# EAGLE board openSX70-FTDI-232RL-Basic-5V_V3 (EAGLE 9.0.0)
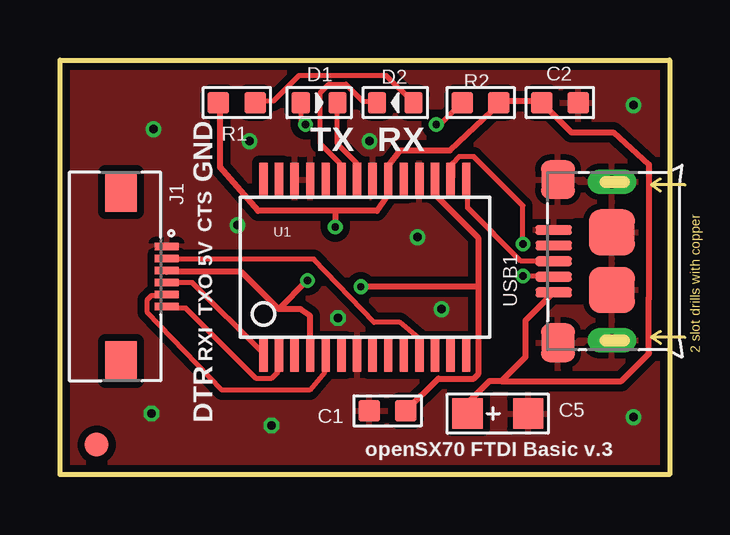
[diagram p0: board, top side]
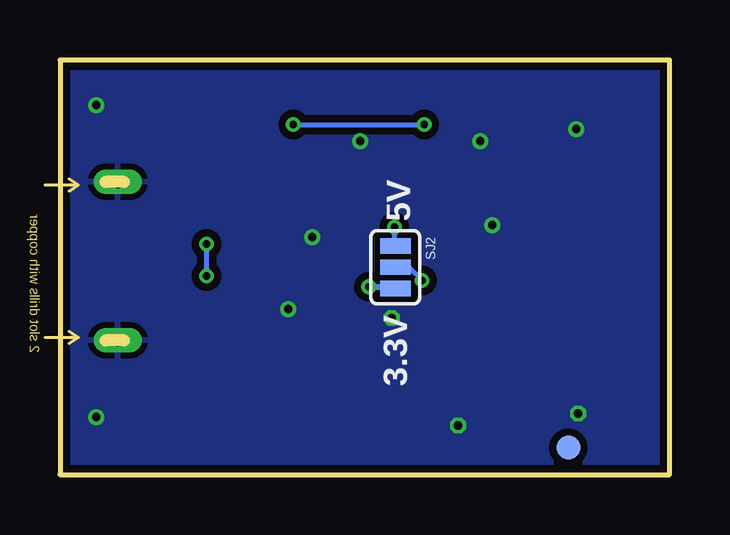
[diagram p1: board, bottom side, seen from below]

Size 25.4 x 17.27 mm. Coordinates in mm from the lower left corner, seen from the top.
Outline: 0,17.27 25.4,17.27 25.4,0 0,0 0,17.27
Copper layers (1*16): Top 0.035mm / dielectric 1.5mm / Bottom 0.035mm
Design rules "SeeedStudio_2layer_DRU_no_angle_20140221": minimum track width 6mil, minimum drill 12mil, track to track 6mil, track to pad 6mil, pad to pad 6mil, via to via 6mil, smd to smd 0mil, copper to edge 10mil, drill to drill 10mil, minimum pad ring 10mil, minimum via ring 6mil, stop-mask expansion 2mil, vias tented up to drill 100mil, thermal gap 10mil
Net classes: 0 default: width 0.203 mm; 1 power: width 0.254 mm

## Footprints (pad centres in the part's own frame; a part is rotated, then mirrored left to right if it is on the bottom)
C0603 = smd 0.889 x 0.889: 1 0,0.762; 2 0,-0.762
AVX-A = smd 1.27 x 1.27: + -1.27,0; - 1.27,0
LED-0603 = smd 0.762 x 0.889: + -0.762,0; - 0.762,0
687106183722 = smd 0.3 x 1: 1 -1.25,1.9; 2 -0.75,1.9; 3 -0.25,1.9; 4 0.25,1.9; 5 0.75,1.9; 6 1.25,1.9 | smd 1.65 x 1.3: Z1 -3.525,0; Z2 3.525,0
FIDUCIAL-1X2 = smd 1 x 1: 1 0,0
R0603 = smd 0.889 x 0.889: 1 0,0.762; 2 0,-0.762
SJ_3 = smd 0.635 x 1.27: 1 -0.889,0; 2 0,0; 3 0.889,0
SSOP28DB = smd 0.348 x 1.397: 1 -4.225,-3.656; 2 -3.575,-3.656; 3 -2.925,-3.656; 4 -2.275,-3.656; 5 -1.625,-3.656; 6 -0.975,-3.656; 7 -0.325,-3.656; 8 0.325,-3.656; 9 0.975,-3.656; 10 1.625,-3.656; 11 2.275,-3.656; 12 2.925,-3.656; 13 3.575,-3.656; 14 4.225,-3.656; 15 4.225,3.656; 16 3.575,3.656; 17 2.925,3.656; 18 2.275,3.656; 19 1.625,3.656; 20 0.975,3.656; 21 0.325,3.656; 22 -0.325,3.656; 23 -0.975,3.656; 24 -1.625,3.656; 25 -2.275,3.656; 26 -2.925,3.656; 27 -3.575,3.656; 28 -4.225,3.656
MICRO-USB5+6P-SMD-0.65-B = smd 0.4 x 1.5: 1 -1.3,-0.25; 2 -0.65,-0.25; 3 0,-0.25; 4 0.65,-0.25; 5 1.3,-0.25 | smd 1.6 x 1.4: S1 -3.4,-0.427; S6 3.4,-0.427 | drill 0.508 pad 1.016 long: S2 -3.3,-2.675; S5 3.3,-2.675 | smd 1.9 x 1.9: S3 -1.2,-2.675; S4 1.2,-2.675

## Placement (x,y rotation side)
C1  100nf  [C0603]  13.65,2.65 270 top
C2  100nf  [C0603]  20.83,15.49 90 top
C5  10uf  [AVX-A]  18.24,2.54 0 top
D1  GREEN-0603  [LED-0603]  10.79,15.49 0 top
D2  YELLOW-0603  [LED-0603]  13.97,15.49 180 top
FRAME1  FRAME-LETTER  [CREATIVE_COMMONS]  -0.69,-1.27 0 top
J1  687106183722  [687106183722]  2.54,8.26 270 top
JP3  FIDUCIAL1X2  [FIDUCIAL-1X2]  1.52,1.24 0 top
JP5  FIDUCIAL1X2  [FIDUCIAL-1X2]  4.22,1.12 0 bottom
R1  1K  [R0603]  7.37,15.49 270 top
R2  1K  [R0603]  17.53,15.49 90 top
SJ2  [SJ_3]  11.43,8.64 270 bottom
U1  FT232RLSSOP  [SSOP28DB]  12.7,8.64 0 top
USB1  10118193-0001LF  [MICRO-USB5+6P-SMD-0.65-B]  20.32,8.89 90 top

## Library data of the parts
C1 C2 = openSX70_PATHFINDER_V5.5-SEEED_20180522; MPN: CC0603KRX7R9BB104
C5 = Seeed-Capacitor-2016; MPN: TAJA106K016RNJ
D1 = Seeed-LED; MPN: 19-217-G7C-AN1P2-3T
D2 = Seeed-LED-2016; MPN: 19-217-Y5C-AM1N1VY-3T
FRAME1 = SparkFun-Aesthetics
J1 = openSX70_PATHFINDER_V5.5-SEEED_20180522; AVAILABILITY: Good; DESCRIPTION: CONN FFC BTM 6POS 0.5MM SMD R/A; MF: Wurth Electronics; MP: 687106183722; PACKAGE: None; PRICE: 1.21 USD
JP3 JP5 SJ2 U1 = SparkFun
R1 R2 = openSX70_PATHFINDER_V5.5-SEEED_20180522; MPN: RC0603FR-071KL
USB1 = Seeed-Connector -2016; MPN: 10118193-0001LF

## Nets
3.3V [power]: C1.1 SJ2.3 U1.17
5V: C2.1 C5.+ R1.2 R2.2 SJ2.1 U1.20 USB1.1
CTS: J1.2 U1.11
DTR: J1.6 U1.2
GND [power]: C1.2 C2.2 C5.- J1.1 U1.7 U1.18 U1.21 U1.25 U1.26 USB1.5 USB1.S1 USB1.S2 USB1.S3 USB1.S4 USB1.S5 USB1.S6
N$1: D2.+ R1.1
N$2: D1.+ R2.1
N$3: U1.16 USB1.2
POWER: J1.3 SJ2.2 U1.4
RXI: J1.5 U1.5
RXLED: D1.- U1.22
TXLED: D2.- U1.23
TXO: J1.4 U1.1
USB_D+: U1.15 USB1.3

## Tracks (layer width: path | path; a pad name or v marks a point on that pad's centre or on a via)
3.3V  (via drill 0.3)
  Top 0.254: 17.42,7.82 17.42,9.87 15.65,11.65 15.65,12.27 U1.17 | 17.42,7.82 17.42,4.18 17.25,4 15.76,4 C1.1 | 17.42,7.82 v12.54,7.82
  Bottom 0.254: v12.54,7.82 11.47,7.82 SJ2.3
5V  (via drill 0.3)
  Top 0.203: 20.54,7.56 USB1.1 20.62,7.56 21.07,7.56 | 18.31,15.56 R2.2 18.23,15.47 18.35,15.47 | 20,15.56 C2.1 | 13.6,11.56 13.6,12.27 U1.20 13.69,12.36 13.69,12.89 | 6.67,15.47 R1.2
  Top 0.254: 20,15.56 18.31,15.56 | 6.67,15.47 6.67,12.8 8.26,10.99 11.47,10.99 | 11.47,10.99 13.21,10.99 13.6,11.56 | 11.47,10.99 v11.47,10.31 | 18.35,15.47 16.26,13.51 14.18,13.51 13.69,12.89 | 24.54,7.39 24.54,12.91 23.05,14.26 21.3,14.26 C2.1 | 24.54,7.39 24.54,7.31 | USB1.1 19.39,6.41 19.39,4.89 18.39,3.89 | 18.39,3.89 17.89,3.89 16.97,2.97 C5.+ | 18.39,3.89 23.39,3.89 24.52,5.02 arc45 24.54,5.08 24.54,7.38 arc45 24.54,7.39
  Bottom 0.203: v11.47,10.31 11.47,9.6 SJ2.1
CTS
  Top 0.203: J1.2 4.45,8.98 10.58,8.98 13.09,6.34 14.16,6.34 14.94,5.69 14.94,5.07 U1.11
DTR
  Top 0.203: J1.6 4.45,6.93 5.25,6.93 8.18,4 8.8,4 9.07,4.27 9.07,4.98 U1.2
GND  (via drill 0.35)
  other vias: 3.81,2.54 11.58,6.53 14.89,9.89 3.89,14.39 15.89,6.89 23.89,15.39 23.89,2.39 8.81,2.04 7.39,10.39 7.89,13.89 12.89,13.89
  pour Bottom (isolate 0.305): 0,-0.03 0,17.3 25.4,17.3 25.4,-0.03
  pour Top (isolate 0.305): 0,-0.03 0,17.3 25.4,17.3 25.4,-0.03
N$1
  Top 0.203: D2.+ 13.6,16.62 9.96,16.62 8.89,15.56 8.18,15.56 R1.1
N$2  (via drill 0.3)
  Top 0.203: v10.22,14.58 10.05,14.76 10.05,15.47 D1.+ | v15.68,14.58 15.82,14.58 16.71,15.47 R2.1
  Bottom 0.203: v15.68,14.58 v10.22,14.58
N$3  (via drill 0.3)
  Top 0.203: v19.29,9.6 19.29,11.2 17.25,13.25 16.62,13.25 16.36,12.98 16.36,12.36 U1.16 | v19.29,8.27 20.54,8.27 USB1.2
  Bottom 0.203: v19.29,8.27 v19.29,9.6
POWER  (via drill 0.3)
  Top 0.203: 4.45,8.45 J1.3
  Top 0.254: 4.45,8.45 7.56,8.45 9.11,6.89 | 9.11,6.89 10.01,6.9 10.41,6.61 U1.4 | 9.11,6.89 v10.31,8.09
  Bottom 0.203: v10.31,8.09 10.85,8.62 11.38,8.62 SJ2.2
RXI
  Top 0.203: J1.5 4.36,7.47 3.82,7.47 3.65,7.29 3.65,6.76 6.76,3.52 10.4,3.52 11.02,4.27 11.02,4.98 U1.5
RXLED
  Top 0.203: D1.- 11.56,13.78 12.36,12.98 12.36,12.36 U1.22
TXLED
  Top 0.203: D2.- 13.16,15.56 12.62,15.56 11.91,16.27 11.2,16.27 10.85,15.91 10.85,13.78 11.65,12.98 11.65,12.36 U1.23
TXO
  Top 0.203: J1.4 5.51,8 8.45,5.07 U1.1
USB_D+
  Top 0.203: USB1.3 19.2,8.89 16.98,11.11 16.98,12.27 U1.15

## Text on the board
tPlace: TX | RX | GND | CTS | 5V | TXO | RXI | DTR | openSX70 FTDI Basic v.3
bPlace: 5V | 3.3V
tValues: Close
Document: P. Dokter, T. Klopfenstein